# Allegro board demoa2.brd
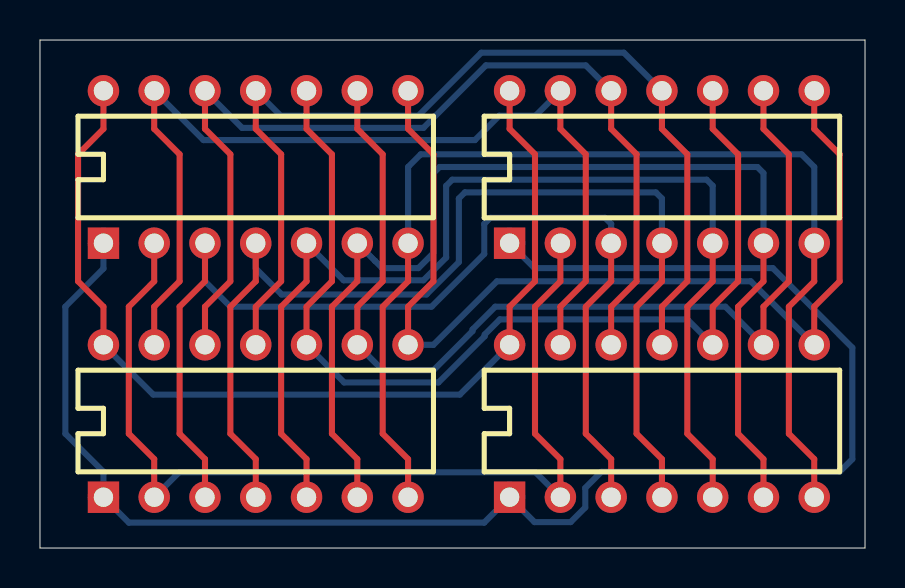
[diagram p0: board, top side]
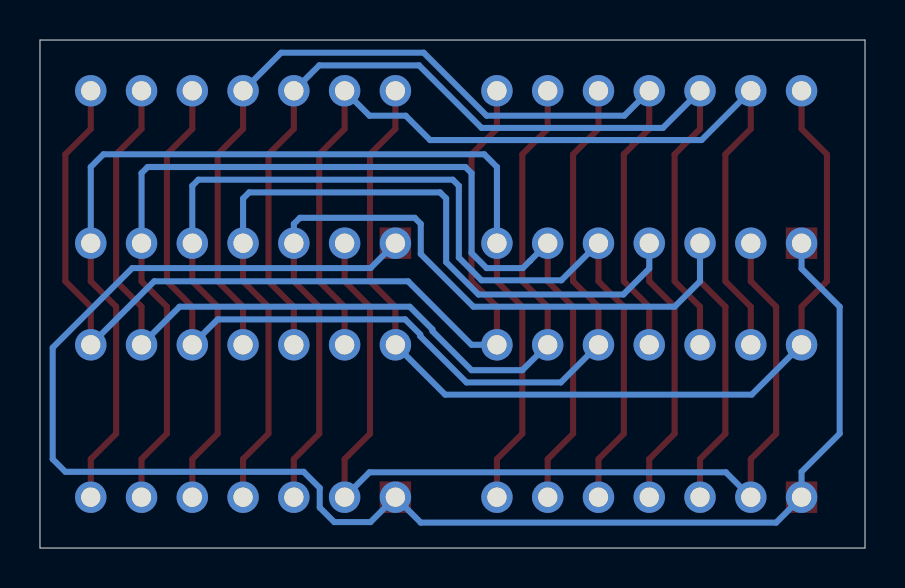
[diagram p1: board, bottom side, seen from below]

Outline 41.27 x 25.4 mm; copper layers: TOP, GND, POWER, INNER1, INNER2, BOTTOM. Coordinates in mm from the lower left corner of the outline.
Outline path: 0,25.4 0,0 41.27,0 41.27,25.4 0,25.4

## Design rules (mm)
nets with their own width: min track width 0.305; nets DAT1 DAT2 DAT3 DAT4 DAT5 DAT6 DAT7 DAT8 DAT9 DAT10 DAT11 DAT12 GND VCC

## Placement (name value [footprint] x y rotation side)
U1  7400  [DIP14]  3.17 15.24 0 top
U2  7400  [DIP14]  23.5 15.24 0 top
U3  7400  [DIP14]  3.17 2.54 0 top
U4  7400  [DIP14]  23.5 2.54 0 top

## Library data of the parts
U1-U4 = 7400

## Footprints (pads in the part's own frame, mm; a bottom-side part is the same pattern mirrored in y, then rotated)
DIP14
  rect 1.575x1.575 hole 0.965: 1(0,0)
  round 1.575 hole 0.965: 2(2.54,0) 3(5.08,0) 4(7.62,0) 5(10.16,0) 6(12.7,0) 7(15.24,0) 8(15.24,7.62) 9(12.7,7.62) 10(10.16,7.62) 11(7.62,7.62) 12(5.08,7.62) 13(2.54,7.62) 14(0,7.62)

## Nets
GND: U1.7(TP-7) U2.7(TP-7) U3.7(TP-7) U4.7(TP-7)
VCC: U1.14(TP-14) U2.14(TP-14) U3.14(TP-14) U4.14(TP-14)
DAT1: U1.2(TP-2) U2.2(TP-2) U3.2(TP-2) U4.2(TP-2)
DAT2: U1.1(TP-1) U2.1(TP-1) U3.1(TP-1) U4.1(TP-1)
DAT3: U1.3(TP-3) U2.3(TP-3) U3.3(TP-3) U4.3(TP-3)
DAT4: U1.5(TP-5) U2.5(TP-5) U3.5(TP-5) U4.5(TP-5)
DAT5: U1.4(TP-4) U2.4(TP-4) U3.4(TP-4) U4.4(TP-4)
DAT6: U1.6(TP-6) U2.6(TP-6) U3.6(TP-6) U4.6(TP-6)
DAT7: U1.10(TP-10) U2.10(TP-10) U3.10(TP-10) U4.10(TP-10)
DAT8: U1.9(TP-9) U2.9(TP-9) U3.9(TP-9) U4.9(TP-9)
DAT9: U1.8(TP-8) U2.8(TP-8) U3.8(TP-8) U4.8(TP-8)
DAT10: U1.13(TP-13) U2.13(TP-13) U3.13(TP-13) U4.13(TP-13)
DAT11: U1.12(TP-12) U2.12(TP-12) U3.12(TP-12) U4.12(TP-12)
DAT12: U1.11(TP-11) U2.11(TP-11) U3.11(TP-11) U4.11(TP-11)

## Routing (per net, layer and track width the routed paths; a pad name or vN(x,y) marks a point on that pad's centre or on a via; arc(x,y) is an arc through that point)
GND: length 56
  TOP w0.305: U3.7 18.42,4.45 17.15,5.71 17.15,12.06 18.42,13.34 U1.7 ; U4.7 38.73,4.45 37.46,5.71 37.46,12.06 38.73,13.34 U2.7
  BOTTOM w0.305: U1.7 18.42,19.05 19.05,19.68 38.1,19.68 38.73,19.05 U2.7
VCC: length 49.9
  TOP w0.305: U2.14 23.5,20.95 24.77,19.68 24.77,13.34 23.5,12.06 U4.14 ; U1.14 3.17,20.95 1.91,19.68 1.91,13.34 3.17,12.06 U3.14
  BOTTOM w0.305: U3.14 5.67,7.67 21,7.67 U4.14
DAT1: length 48.9
  TOP w0.305: U1.2 5.71,13.34 4.45,12.06 4.45,5.71 5.71,4.45 U3.2 ; U2.2 26.04,13.34 24.77,12.06 24.77,5.71 26.04,4.45 U4.2
  BOTTOM w0.305: U4.2 24.79,3.78 6.96,3.78 U3.2
DAT2: length 80.1
  BOTTOM w0.305: U2.1 24.74,14 36.66,14 40.64,10.02 40.64,4.45 40,3.81 28.08,3.81 27.28,3 27.28,2.02 26.55,1.3 24.74,1.3 U4.1 22.23,1.27 4.45,1.27 U3.1 3.17,3.81 1.27,5.71 1.27,12.06 3.17,13.97 U1.1
DAT3: length 54.1
  TOP w0.305: U2.3 28.58,13.34 27.31,12.06 27.31,5.71 28.58,4.45 U4.3 ; U3.3 8.26,4.45 6.98,5.71 6.98,12.06 8.26,13.34 U1.3
  BOTTOM w0.305: U2.3 28.58,16.21 28.27,16.51 22.53,16.51 22.23,16.21 22.23,14.7 19.59,12.06 9.53,12.06 8.26,13.34 U1.3
DAT4: length 55.8
  TOP w0.305: U1.5 13.33,13.34 12.06,12.06 12.06,5.71 13.33,4.45 U3.5 ; U2.5 33.66,13.34 32.38,12.06 32.38,5.71 33.66,4.45 U4.5
  BOTTOM w0.305: U2.5 33.66,18.11 33.35,18.41 20.62,18.41 20.32,18.11 20.32,14.52 19.18,13.39 15.19,13.39 U1.5
DAT5: length 56
  TOP w0.305: U4.4 31.12,4.45 29.85,5.71 29.85,12.06 31.12,13.34 U2.4 ; U1.4 10.79,13.34 9.53,12.06 9.53,5.71 10.79,4.45 U3.4
  BOTTOM w0.305: U1.4 10.79,13.97 12.09,12.67 19.34,12.67 20.96,14.29 20.96,17.48 21.26,17.78 30.81,17.78 31.12,17.48 U2.4
DAT6: length 56.4
  TOP w0.305: U2.6 36.2,13.34 34.92,12.06 34.92,5.71 36.2,4.45 U4.6 ; U1.6 15.88,13.34 14.61,12.06 14.61,5.71 15.88,4.45 U3.6
  BOTTOM w0.305: U1.6 16.76,14.36 16.76,14.36 17.12,14 18.93,14 19.69,14.75 19.69,18.75 19.99,19.05 35.89,19.05 36.2,18.75 U2.6
DAT7: length 50.5
  TOP w0.305: U3.10 13.33,12.06 14.61,13.34 14.61,19.68 13.33,20.95 U1.10 ; U4.10 33.66,12.06 34.92,13.34 34.92,19.68 33.66,20.95 U2.10
  BOTTOM w0.305: U3.10 15.22,8.28 19.94,8.28 22.25,10.59 22.25,10.68 23,11.43 32.38,11.43 U4.10
DAT8: length 50.5
  TOP w0.305: U2.9 36.2,20.95 37.46,19.68 37.46,13.34 36.2,12.06 U4.9 ; U3.9 15.88,12.06 17.15,13.34 17.15,19.68 15.88,20.95 U1.9
  BOTTOM w0.305: U4.9 34.29,12.06 22.78,12.06 21.64,10.93 21.64,10.85 19.69,8.89 17.15,8.89 U3.9
DAT9: length 50.5
  TOP w0.305: U4.8 38.73,12.06 40,13.34 40,19.68 38.73,20.95 U2.8 ; U3.8 18.42,12.06 19.69,13.34 19.69,19.68 18.42,20.95 U1.8
  BOTTOM w0.305: U3.8 19.69,10.16 22.86,13.34 35.56,13.34 U4.8
DAT10: length 49.9
  TOP w0.305: U4.13 26.04,12.06 27.31,13.34 27.31,19.68 26.04,20.95 U2.13 ; U3.13 5.71,12.06 6.98,13.34 6.98,19.68 5.71,20.95 U1.13
  BOTTOM w0.305: U1.13 8.18,20.4 21.76,20.4 22.98,21.62 24.79,21.62 U2.13
DAT11: length 50.4
  TOP w0.305: U2.12 28.58,20.95 29.85,19.68 29.85,13.34 28.58,12.06 U4.12 ; U1.12 8.26,20.95 9.53,19.68 9.53,13.34 8.26,12.06 U3.12
  BOTTOM w0.305: U2.12 27.31,24.13 22.31,24.13 19.18,21.01 10.11,21.01 U1.12
DAT12: length 50.4
  TOP w0.305: U4.11 31.12,12.06 32.38,13.34 32.38,19.68 31.12,20.95 U2.11 ; U1.11 10.79,20.95 12.06,19.68 12.06,13.34 10.79,12.06 U3.11
  BOTTOM w0.305: U2.11 29.21,24.77 22.08,24.77 18.93,21.62 12.04,21.62 U1.11
